# EAGLE board my board3a (EAGLE 6.2)
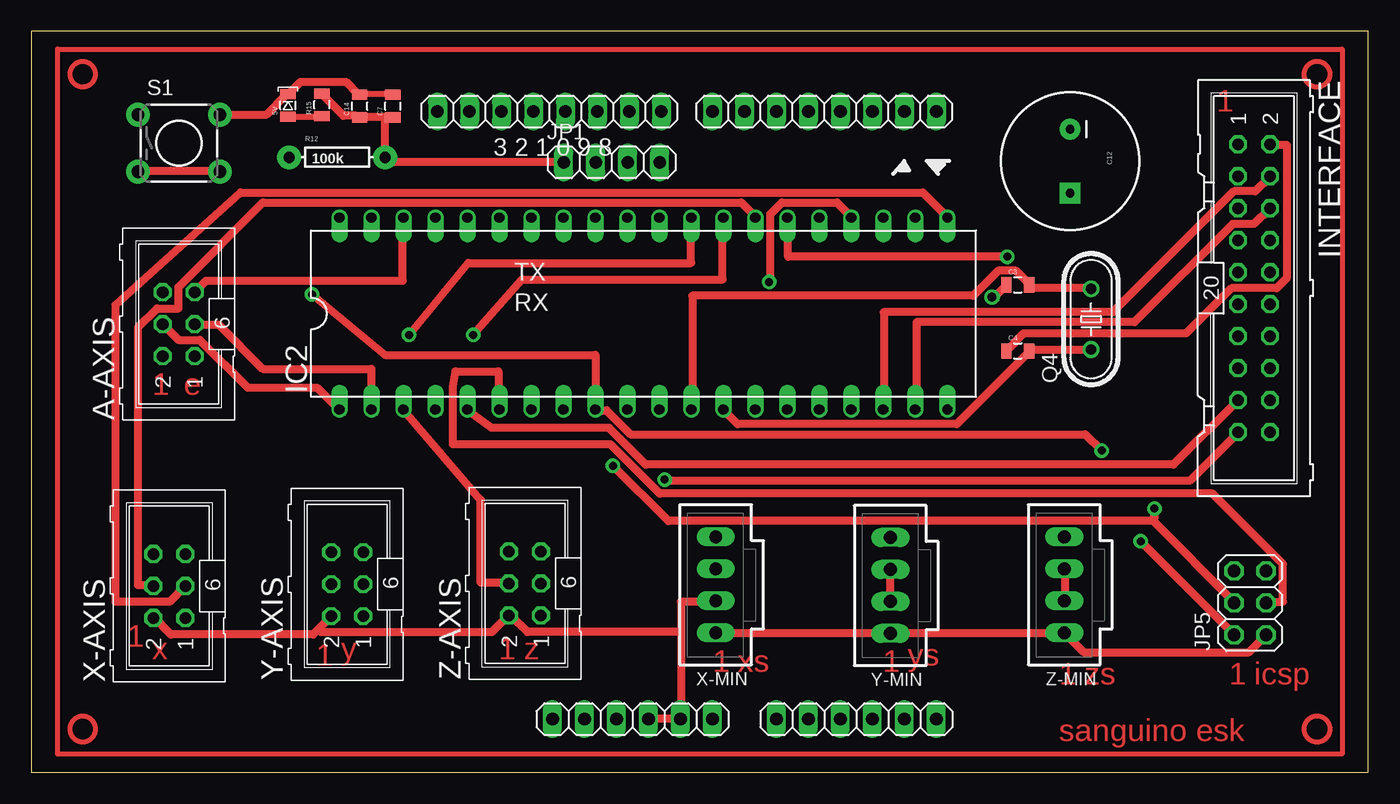
[diagram p0: board, top side]
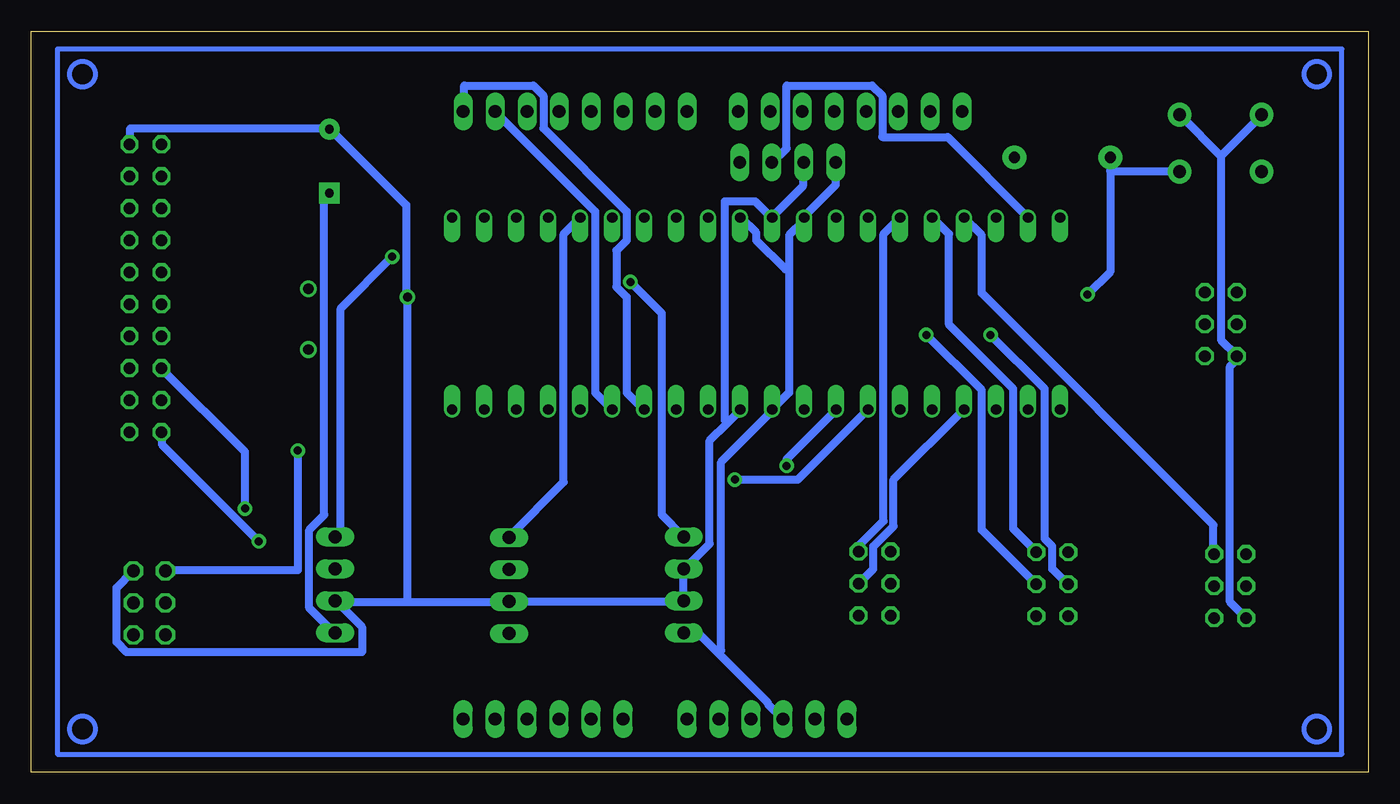
[diagram p1: board, bottom side, seen from below]

Size 106.12 x 58.84 mm. Coordinates in mm from the lower left corner, seen from the top.
Outline: 0,0 106.12,0 106.12,58.84 0,58.84 0,0
Copper layers (1*16): Top 0.035mm / dielectric 1.5mm / Bottom 0.035mm
Design rules: minimum track width 25mil, minimum drill 25mil, track to track 6mil, track to pad 6mil, pad to pad 6mil, via to via 6mil, smd to smd 6mil, copper to edge 30mil, drill to drill 6mil, minimum pad ring 10mil, minimum via ring 10mil, stop-mask expansion 4mil, vias tented up to drill 0mil, thermal gap 10mil
Net classes: 0 default: width 0.203 mm; 1 power: width 0.254 mm; 2 gnd: width 0.305 mm, drill 0.711 mm, clearance 0.203 mm; 3 usbvcc: width 0.508 mm, drill 0.711 mm, clearance 0.203 mm; 4 aref: width 0.406 mm

## Footprints (pad centres in the part's own frame; a part is rotated, then mirrored left to right if it is on the bottom)
LED-0805 = smd 1.2 x 0.8: A 0,-0.9; C 0,0.9
ML6 = drill 0.914 octagon: 1 -2.54,-1.27; 2 -2.54,1.27; 3 0,-1.27; 4 0,1.27; 5 2.54,-1.27; 6 2.54,1.27
0805 = smd 0.8 x 1.2: 1 -0.9,0; 2 0.9,0
CPOL-RADIAL-1000UF-25V = drill 0.7 pad 1.651 square: 1 2.54,0 | drill 0.7 pad 1.651: 2 -2.54,0
DIL40 = drill 0.813 offset: 1 -24.13,-7.62; 2 -21.59,-7.62; 3 -19.05,-7.62; 4 -16.51,-7.62; 5 -13.97,-7.62; 6 -11.43,-7.62; 7 -8.89,-7.62; 8 -6.35,-7.62; 9 -3.81,-7.62; 10 -1.27,-7.62; 11 1.27,-7.62; 12 3.81,-7.62; 13 6.35,-7.62; 14 8.89,-7.62; 15 11.43,-7.62; 16 13.97,-7.62; 17 16.51,-7.62; 18 19.05,-7.62; 19 21.59,-7.62; 20 24.13,-7.62; 21 24.13,7.62; 22 21.59,7.62; 23 19.05,7.62; 24 16.51,7.62; 25 13.97,7.62; 26 11.43,7.62; 27 8.89,7.62; 28 6.35,7.62; 29 3.81,7.62; 30 1.27,7.62; 31 -1.27,7.62; 32 -3.81,7.62; 33 -6.35,7.62; 34 -8.89,7.62; 35 -11.43,7.62; 36 -13.97,7.62; 37 -16.51,7.62; 38 -19.05,7.62; 39 -21.59,7.62; 40 -24.13,7.62
ML20 = drill 0.914 octagon: 1 -11.43,-1.27; 2 -11.43,1.27; 3 -8.89,-1.27; 4 -8.89,1.27; 5 -6.35,-1.27; 6 -6.35,1.27; 7 -3.81,-1.27; 8 -3.81,1.27; 9 -1.27,-1.27; 10 -1.27,1.27; 11 1.27,-1.27; 12 1.27,1.27; 13 3.81,-1.27; 14 3.81,1.27; 15 6.35,-1.27; 16 6.35,1.27; 17 8.89,-1.27; 18 8.89,1.27; 19 11.43,-1.27; 20 11.43,1.27
1X08 = drill 1.016 long: 1 -8.89,0; 2 -6.35,0; 3 -3.81,0; 4 -1.27,0; 5 1.27,0; 6 3.81,0; 7 6.35,0; 8 8.89,0
1X06 = drill 1.016 long: 1 -6.35,0; 2 -3.81,0; 3 -1.27,0; 4 1.27,0; 5 3.81,0; 6 6.35,0
1X04 = drill 1.016 long: 1 -3.81,0; 2 -1.27,0; 3 1.27,0; 4 3.81,0
2X03 = drill 1.016 octagon: 1 -2.54,-1.27; 2 -2.54,1.27; 3 0,-1.27; 4 0,1.27; 5 2.54,-1.27; 6 2.54,1.27
HC49/S = drill 0.813: 1 -2.413,0; 2 2.413,0
AXIAL-0.3 = drill 0.9 pad 1.88: P$1 -3.81,0; P$2 3.81,0
TACTILE-PTH = drill 1.016 pad 1.88: 1 -3.251,2.261; 2 3.251,2.261; 3 -3.251,-2.261; 4 3.251,-2.261
70543-04 = drill 1.016 long: 1 -3.81,0; 2 -1.27,0; 3 1.27,0; 4 3.81,0

## Placement (x,y rotation side)
5V  [LED-0805]  20.36,52.96 0 top
A-AXIS  [ML6]  11.69,35.59 90 top
C3  16pf  [0805]  78.32,38.72 0 top
C4  16pf  [0805]  78.32,33.48 0 top
C7  .1uF  [0805]  28.69,52.91 90 top
C12  1000uF  [CPOL-RADIAL-1000UF-25V]  82.47,48.54 270 top
C14  .1uF  [0805]  26.05,52.91 90 top
IC2  ATMEGA644-20PU  [DIL40]  48.58,36.44 0 top
INTERFACE  [ML20]  97.07,38.45 270 top
J1  [1X08]  62.96,52.49 180 top
J2  [1X06]  65.5,4.23 0 top
J3  [1X08]  41.12,52.49 180 top
JP1  [1X04]  46.07,48.45 0 top
JP5  [2X03]  96.76,13.46 90 top
POWER  [1X06]  47.72,4.23 0 top
Q4  16MHZ  [HC49/S]  84.13,35.99 90 top
R12  100k  [AXIAL-0.3]  24.27,48.85 0 top
R15  1K  [0805]  23.05,53.01 90 top
S1  RESET  [TACTILE-PTH]  11.71,49.97 0 top
X-AXIS  [ML6]  10.94,14.79 90 top
X-MIN  C-GRID-04-70543  [70543-04]  54.32,14.9 90 top
Y-AXIS  [ML6]  25.06,14.95 90 top
Y-MIN  C-GRID-04-70543  [70543-04]  68.19,14.85 90 top
Z-AXIS  [ML6]  39.19,15 90 top
Z-MIN  C-GRID-04-70543  [70543-04]  82.01,14.9 90 top

## Library data of the parts
5V C3 C4 C7 C12 C14 R12 R15 S1 = SparkFun
A-AXIS X-AXIS Y-AXIS Z-AXIS = con-ml
IC2 = atmel; MPN: ATMEGA644-20PU; OC_FARNELL: 1288340; OC_NEWARK: 23M5060
INTERFACE = con-harting-ml
J1-J3 JP1 JP5 POWER = pinhead
Q4 = crystal
X-MIN Y-MIN Z-MIN = con-molex

## Nets
!HOTBED: IC2.18 INTERFACE.4
!HOTEND: IC2.19 INTERFACE.6
!RESET: IC2.9 JP5.6 R12.P$1 S1.3 S1.4
!STEP-ENABLE: IC2.20
!STEP-ENABLE-E: A-AXIS.5 IC2.38
!STEP-ENABLE-X: IC2.37 X-AXIS.5
!STEP-ENABLE-Y: IC2.36 Y-AXIS.5
!STEP-ENABLE-Z: IC2.35 Z-AXIS.5
A0: IC2.40
A1: IC2.39 JP1.3
AIFO: IC2.14 J1.1
AOFI: IC2.15 J1.2
ATX_5V [usbvcc]: C7.1 C12.1 C14.1 IC2.10 IC2.30 IC2.32 JP1.1 JP5.1 POWER.3 R12.P$2 R15.2 X-MIN.1 Y-MIN.1 Z-MIN.1
B-THERM: IC2.34
D9: INTERFACE.8
E-DIR: A-AXIS.4 IC2.1
E-STEP: A-AXIS.3 IC2.2
E-THERM: IC2.33
GND [gnd]: 5V.C A-AXIS.2 C3.1 C4.1 C7.2 C12.2 C14.2 IC2.11 IC2.31 INTERFACE.2 JP1.2 JP5.5 POWER.4 POWER.5 S1.1 S1.2 X-AXIS.2 X-MIN.2 X-MIN.3 Y-AXIS.2 Y-MIN.2 Y-MIN.3 Z-AXIS.2 Z-MIN.2 Z-MIN.3
N$25: 5V.A R15.1
N$31: C3.2 IC2.12 Q4.2
N$32: C4.2 IC2.13 Q4.1
PB4-PWM: IC2.5 INTERFACE.17
PB5-MOSI: IC2.6 JP5.3
PB6-MISO: IC2.7 INTERFACE.19 JP5.2
PB7-SCK: IC2.8 INTERFACE.15 JP5.4
PC0-SCL: IC2.22
PC1-SDA: IC2.23
PD2-RX1: IC2.16
PD3-TX1: IC2.17
X-DIR: IC2.27 X-AXIS.4
X-STEP: IC2.21 X-AXIS.3
X-STOP: IC2.24 X-MIN.4
Y-DIR: IC2.29 Y-AXIS.4
Y-STEP: IC2.28 Y-AXIS.3
Y-STOP: IC2.25 Y-MIN.4
Z-DIR: IC2.3 Z-AXIS.4
Z-STEP: IC2.4 Z-AXIS.3
Z-STOP: IC2.26 Z-MIN.4

## Tracks (layer width: path | path; a pad name or v marks a point on that pad's centre or on a via)
!HOTBED
  Top 0.635: IC2.18 67.67,28.85 67.67,36.55 85.87,36.55 95.47,46.15 97.17,46.15 98.27,47.25 INTERFACE.4
!HOTEND
  Top 0.635: IC2.19 70.27,28.85 70.27,35.75 87.57,35.75 95.37,43.55 97.07,43.55 98.27,44.75 INTERFACE.6
!RESET  (via drill 0.64)
  Top 0.483: 8.47,47.85 S1.3 | 14.87,47.85 S1.4
  Top 0.635: S1.3 8.67,47.75 14.67,47.75 S1.4 | v22.27,37.95 28.07,33.15 44.77,33.15 44.77,28.85 IC2.9 45.07,28.75 45.67,28.75 47.57,26.85 83.67,26.85 v84.97,25.55
  Bottom 0.635: v22.27,37.95 20.47,39.75 20.47,47.75 | 20.47,47.75 20.47,48.75 R12.P$1 | v84.97,25.55 84.97,16.05 95.47,16.05 JP5.6 | 20.47,47.75 14.97,47.75 S1.4
!STEP-ENABLE-E
  Top 0.635: IC2.38 29.47,44.05 29.47,39.05 13.87,39.05 12.97,38.15 A-AXIS.5
!STEP-ENABLE-X
  Bottom 0.635: IC2.37 30.67,42.65 30.67,38.05 12.27,19.65 12.27,17.35 X-AXIS.5
!STEP-ENABLE-Y
  Bottom 0.635: IC2.36 34.57,44.05 33.27,42.75 33.27,35.55 28.17,30.45 28.17,19.35 26.37,17.55 Y-AXIS.5
!STEP-ENABLE-Z
  Bottom 0.635: IC2.35 37.17,44.05 38.47,42.75 38.47,19.95 40.37,18.05 40.37,17.55 Z-AXIS.5
A1
  Bottom 0.635: IC2.39 27.07,44.15 33.37,50.45 38.57,50.45 38.57,53.75 39.37,54.55 46.17,54.55 46.17,49.55 47.27,48.45 JP1.3
AIFO
  Bottom 0.635: IC2.14 57.57,28.85 58.87,30.15 58.87,37.75 59.67,38.55 59.67,41.45 58.87,42.25 58.87,44.55 65.47,51.15 65.47,53.75 66.27,54.55 71.77,54.55 71.77,52.55 J1.1
AOFI
  Bottom 0.635: IC2.15 60.07,28.85 61.37,30.15 61.37,44.55 69.27,52.45 J1.2
ATX_5V
  Top 0.635: 28.07,52.05 28.67,52.05 C7.1 | 28.07,52.05 26.07,52.05 C14.1 25.77,52.15 24.77,52.15 23.07,53.85 R15.2 | 28.07,52.05 R12.P$2 28.37,48.75 28.67,48.45 JP1.1 | JP5.1 97.97,10.85 96.67,9.55 83.57,9.55 82.07,11.05 Z-MIN.1 81.77,11.05 68.27,11.05 Y-MIN.1 67.87,11.05 54.37,11.05 X-MIN.1
  Bottom 0.635: JP1.1 42.27,46.65 44.77,44.15 IC2.32 44.87,43.75 45.97,42.65 45.97,39.95 | 45.97,39.95 45.97,30.15 47.27,28.85 IC2.10 47.47,28.55 51.37,24.65 51.37,9.65 51.57,9.45 | IC2.30 49.77,44.05 48.57,42.85 48.57,42.25 46.27,39.95 45.97,39.95 | 51.57,9.45 53.17,11.05 54.27,11.05 X-MIN.1 | 51.57,9.45 47.67,5.55 47.67,5.45 46.47,4.25 POWER.3 | C12.1 82.47,45.95 82.87,45.55 82.87,20.45 84.07,19.25 84.07,13.05 82.07,11.05 Z-MIN.1
E-DIR
  Top 0.635: IC2.1 24.37,28.85 22.67,30.55 17.17,30.55 13.37,34.35 11.67,34.35 10.47,35.55 A-AXIS.4
E-STEP
  Top 0.635: IC2.2 26.97,28.85 26.97,32.05 18.37,32.05 14.87,35.55 12.97,35.55 A-AXIS.3
GND  (via drill 0.71)
  Top 0.483: C14.2 26.07,53.85 28.67,53.85 C7.2 | 47.27,44.05 IC2.31
  Top 0.635: v76.27,37.75 76.47,37.75 77.37,38.65 C3.1 | C4.1 77.47,33.55 78.77,34.85 91.67,34.85 95.27,38.45 98.87,38.45 99.67,39.25 99.67,49.85 98.37,49.85 INTERFACE.2 | S1.2 14.97,52.25 18.67,52.25 20.27,53.85 5V.C 20.57,54.05 21.37,54.85 24.97,54.85 25.87,53.95 C14.2 | Y-MIN.2 68.17,13.65 68.17,16.05 Y-MIN.3 | Z-MIN.2 82.07,13.65 82.07,16.15 Z-MIN.3 | 22.77,11.35 23.77,12.35 Y-AXIS.2 | 22.77,11.35 22.37,10.95 11.07,10.95 9.77,12.25 X-AXIS.2 | 22.77,11.35 22.97,11.15 36.57,11.15 37.87,12.45 Z-AXIS.2 38.17,12.35 39.37,11.15 51.57,11.15 | POWER.4 49.07,4.25 51.47,4.25 POWER.5 51.57,4.55 51.57,11.15 | 49.87,28.85 IC2.11 | 51.57,11.15 51.57,13.55 54.27,13.55 X-MIN.2
  Bottom 0.635: INTERFACE.2 98.27,49.95 98.27,51.15 82.77,51.15 C12.2 82.37,51.05 76.37,45.05 76.37,37.85 v76.27,37.75 76.27,13.55 | 11.67,48.95 11.67,34.35 10.47,33.15 A-AXIS.2 10.47,32.75 10.97,32.25 10.97,13.55 9.77,12.35 X-AXIS.2 | 11.67,48.95 14.87,52.15 S1.2 | 11.67,48.95 8.47,52.15 S1.1 | JP5.5 98.07,15.95 99.37,14.65 99.37,10.35 98.57,9.55 79.87,9.55 79.87,11.55 81.97,13.65 Z-MIN.2 81.47,13.55 76.27,13.55 | 76.27,13.55 68.27,13.55 Y-MIN.2 67.87,13.55 54.67,13.55 X-MIN.2 54.37,13.65 54.37,15.85 X-MIN.3 54.27,16.15 52.27,18.15 52.27,26.35 50.87,27.75 | JP1.2 44.87,48.45 44.87,46.55 47.27,44.15 IC2.31 47.57,44.25 48.67,45.35 51.07,45.35 51.07,27.95 50.87,27.75 | 50.87,27.75 49.87,28.75 IC2.11
N$1
  Top 0.406: 2.07,57.45 104.07,57.45 104.07,1.45 2.07,1.45 2.07,57.45
N$2
  Bottom 0.406: 2.07,57.45 104.07,57.45 104.07,1.45 2.07,1.45 2.07,57.45
N$25
  Top 0.483: 5V.A 20.47,52.05 22.87,52.05 R15.1
N$31
  Top 0.635: Q4.2 84.07,38.45 79.47,38.45 79.27,38.65 C3.2 79.07,38.95 78.17,39.85 76.77,39.85 74.77,37.85 52.47,37.85 52.47,28.85 IC2.12
N$32
  Top 0.635: Q4.1 84.07,33.55 79.27,33.55 C4.2 79.07,33.25 73.47,27.65 56.07,27.65 54.97,28.75 IC2.13
PB4-PWM
  Top 0.635: IC2.5 34.67,28.75 36.57,27.35 45.87,27.35 48.77,24.45 90.67,24.45 95.77,29.55 INTERFACE.17
PB5-MOSI
  Top 0.635: IC2.6 37.07,28.85 37.07,31.85 33.67,31.85 33.47,30.65 33.47,26.05 45.97,26.05 49.87,22.15 93.77,22.15 99.37,16.55 99.37,13.55 98.07,13.55 JP5.3
PB6-MISO  (via drill 0.64)
  Top 0.635: v50.27,23.25 50.67,23.15 91.97,23.15 95.77,26.95 INTERFACE.19 | v88.07,18.35 95.47,10.95 JP5.2
  Bottom 0.635: v50.27,23.25 45.27,23.25 39.77,28.75 IC2.7 | v88.07,18.35 95.77,26.05 95.77,26.95 INTERFACE.19
PB7-SCK  (via drill 0.64)
  Top 0.635: v46.17,24.35 50.57,19.95 89.07,19.95 | 89.07,19.95 95.47,13.55 JP5.4 | v89.17,20.95 89.17,20.25 89.07,19.95
  Bottom 0.635: v46.17,24.35 46.17,24.85 42.27,28.75 IC2.8 | v89.17,20.95 89.17,25.45 95.77,32.05 INTERFACE.15
X-DIR
  Top 0.635: IC2.27 57.47,44.15 56.37,45.25 18.37,45.25 11.67,38.55 11.67,36.85 9.97,36.85 8.47,35.35 8.47,14.85 9.67,14.85 X-AXIS.4
X-STEP
  Top 0.635: IC2.21 72.67,44.15 70.77,46.05 16.57,46.05 6.67,37.15 6.67,13.55 10.97,13.55 12.17,14.75 X-AXIS.3
X-STOP  (via drill 0.64)
  Top 0.635: v58.57,38.95 58.67,38.95 58.67,44.35 59.57,45.25 63.97,45.25 65.07,44.15 IC2.24
  Bottom 0.635: v58.57,38.95 56.07,36.45 56.07,20.45 54.37,18.75 X-MIN.4
Y-DIR  (via drill 0.64)
  Top 0.635: v29.97,34.75 34.67,40.45 52.37,40.45 52.37,44.05 IC2.29
  Bottom 0.635: v29.97,34.75 25.67,30.45 25.67,18.55 25.07,17.95 25.07,16.15 23.87,14.95 Y-AXIS.4
Y-STEP  (via drill 0.64)
  Top 0.635: v35.07,34.75 38.97,39.15 54.87,39.15 54.87,44.05 IC2.28
  Bottom 0.635: v35.07,34.75 30.67,30.35 30.67,19.25 26.37,14.95 Y-AXIS.3
Y-STOP
  Bottom 0.635: IC2.25 62.57,44.05 63.87,42.75 63.87,23.05 68.17,18.75 Y-MIN.4
Z-DIR
  Top 0.635: IC2.3 29.57,28.75 35.67,21.65 35.67,15.05 37.87,15.05 Z-AXIS.4
Z-STEP
  Bottom 0.635: IC2.4 32.17,28.75 37.67,23.25 37.67,19.55 39.27,17.95 39.27,16.15 40.37,15.05 Z-AXIS.3
Z-STOP  (via drill 0.64)
  Top 0.635: v77.47,40.95 60.07,40.95 60.07,44.05 IC2.26
  Bottom 0.635: v77.47,40.95 81.57,36.85 81.57,19.15 81.97,18.75 Z-MIN.4
(copper drawn outside any net)
  shapes: Bottom circle x4, Top circle x4

## Text on the board
Top: 1 | 1 | e | 1 | x | 1 | y | 1 | z | 1 | x | xs | 1 | y | ys | 1 | z | zs | 1 | icsp | sanguino esk
tNames: 3 2 1 0 9 8 | TX | RX